# Altium PCB quadrotor4.PcbDoc
Units mil, origin at the board's own origin, x right, y up, seen from the top; angles counter-clockwise.
Board outline 2224.41 x 2352.36 mil, 2 copper layers (Top Layer, Bottom Layer); 100 components, 72 nets, 372 pads, 27 vias.
Unrouted connection lines stored in the file: 246.
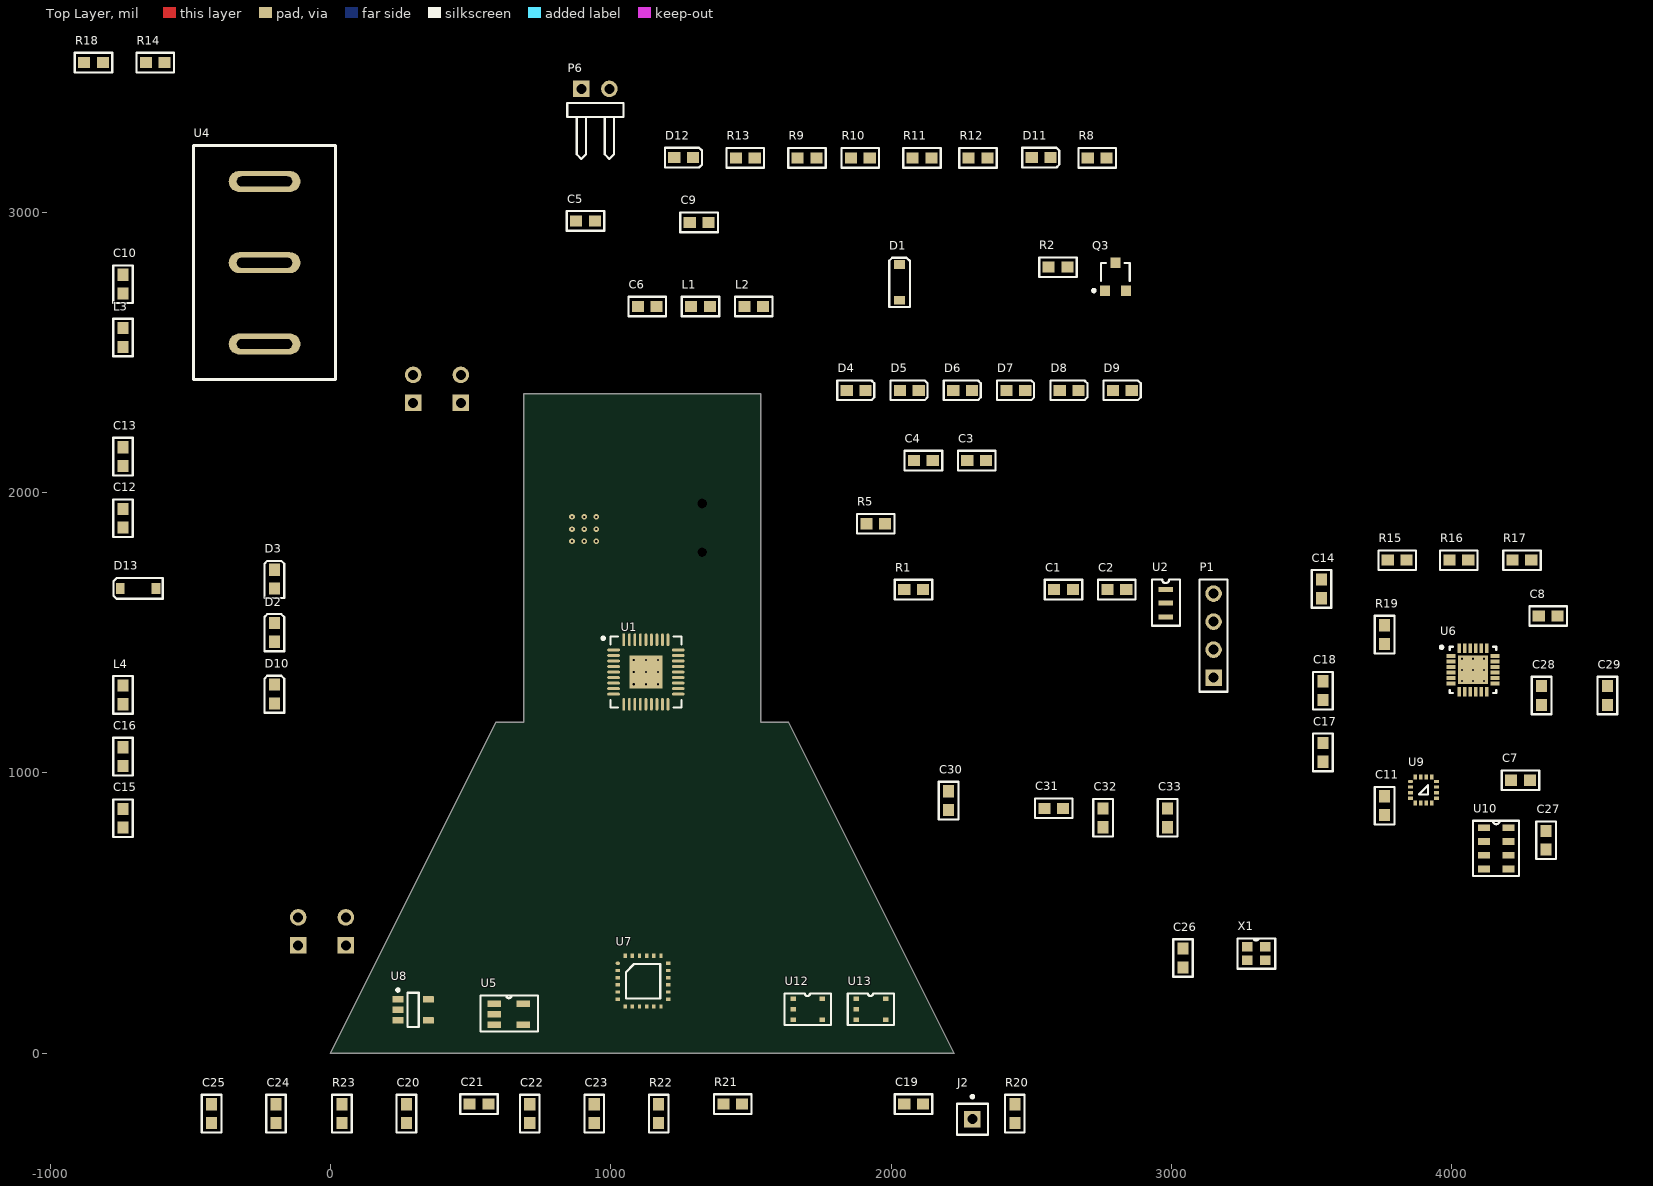
[diagram p0: Top Layer view]
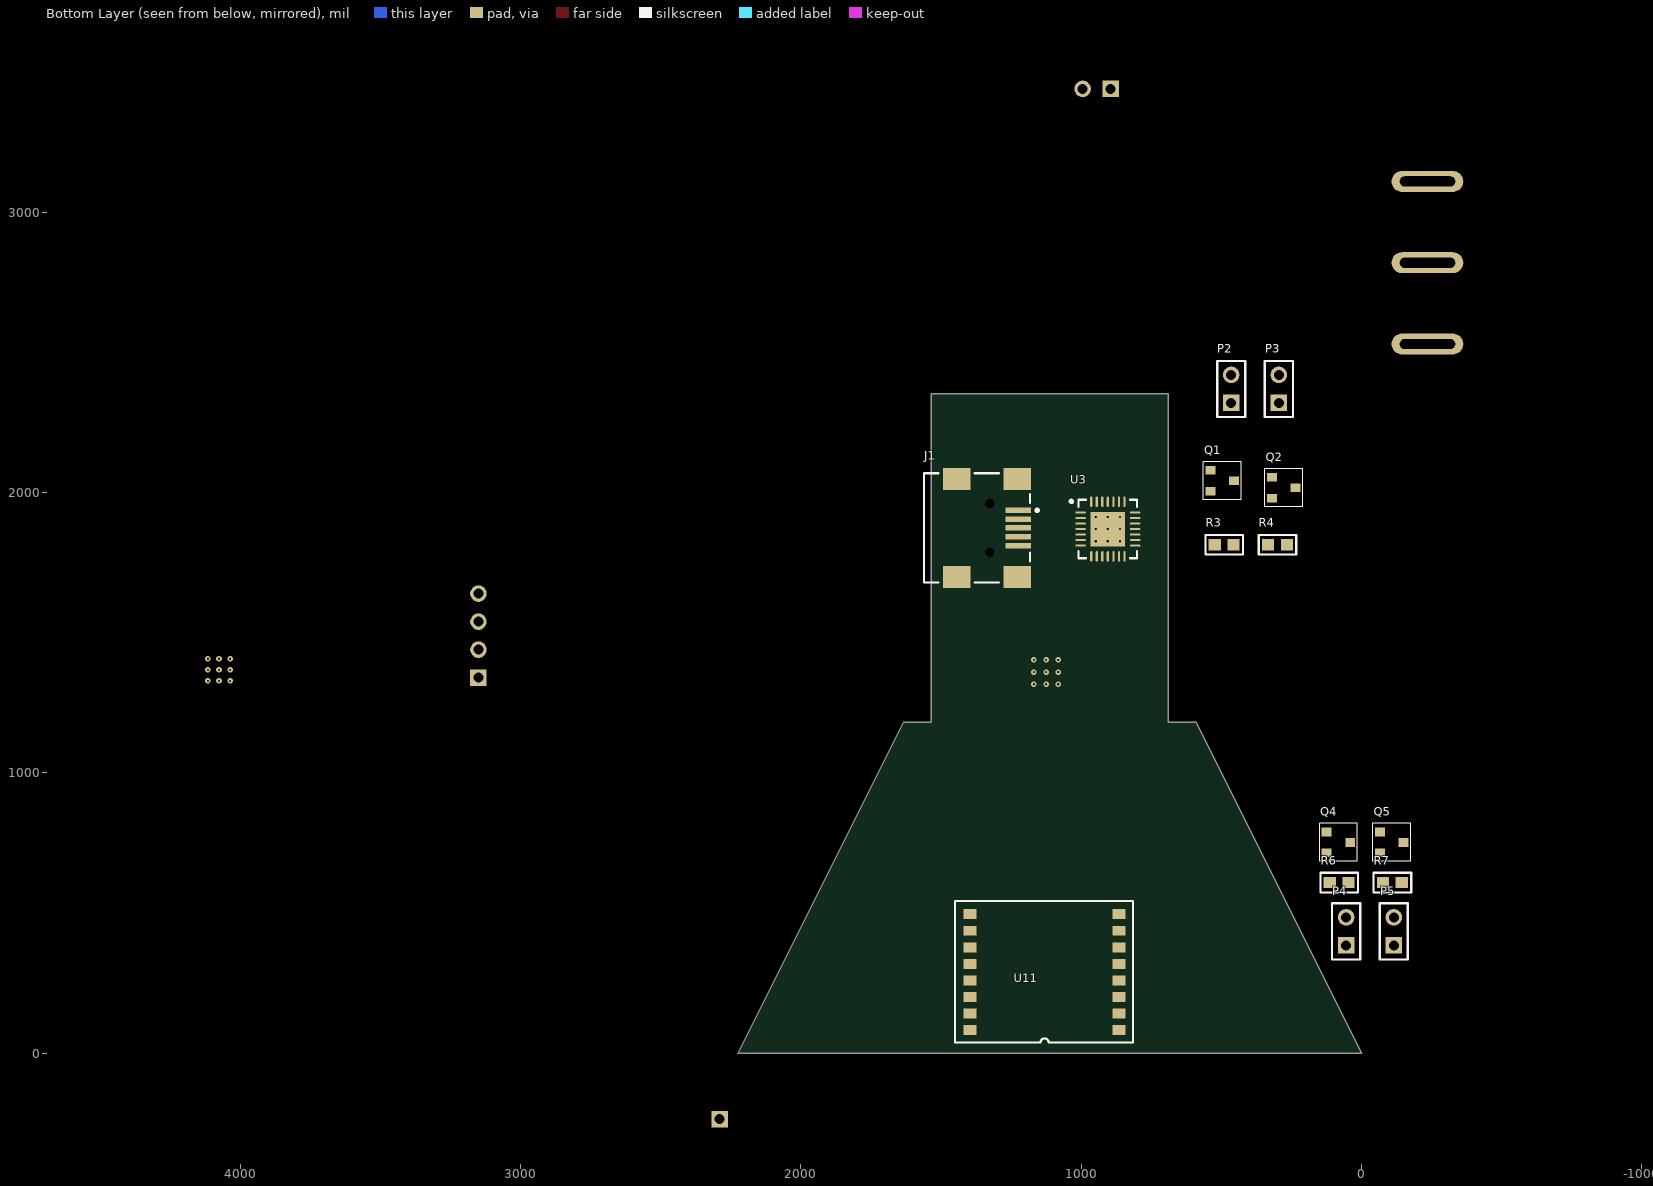
[diagram p1: Bottom Layer view, seen from below]

## Layer stack, top to bottom
Top Solder: solder mask 0.4, Solder Resist, Dk 3.5
Top Layer: signal copper 1.4
Dielectric 1: dielectric 12.6, FR-4, Dk 4.8
Bottom Layer: signal copper 1.4
Bottom Solder: solder mask 0.4, Solder Resist, Dk 3.5

## Board outline
0,0 590.55,1181.1 688.98,1181.1 688.98,2352.36 1535.43,2352.36 1535.43,1181.1 1633.86,1181.1 2224.41,0

## Design rules (kind name [scope] priority, off if disabled: settings)
Clearance [All] p1: gap=10 ignorepadtopadclearanceinfootprint=FALSE except(0: Arc-Hole Track-Hole SMDPad-Hole THPad-Hole Via-Hole Fill-Hole Poly-Hole Region-Hole Text-Hole)
PolygonConnect [All] p1: connectstyle=Relief reliefconductorwidth=10 reliefentries=4 polygonreliefangle="90 Angle" airgapwidth=10
RoutingVias [All] p1: holewidth=28 width=50 viastyle="Through Hole" minholewidth=28 minwidth=50 maxholewidth=28 maxwidth=50
SolderMaskExpansion [All] p1: expansion=4
Width [All] p1: maxlimit=10 minlimit=10 preferedwidth=10
30 further rules are at their usual default settings.

## Components (designator, comment, footprint, x,y, rotation, side; value= is the part's Value field where it differs from the comment)
C1 "CAP" 0603 2615,1655 r0 top value=0.1uF
C2 "CAP" 0603 2805,1655 r0 top value=2.2uF
C3 "CAP" 0603 2305,2115 r0 top value=2.2uF
C4 "CAP" 0603 2115,2115 r0 top value=2.2uF
C5 "CAP" 0603 910,2970 r0 top value=2.2uF
C6 "CAP" 0603 1130,2665 r0 top value=10uF
C7 "CAP" 0603 4245,975 r0 top value=2.2nF
C8 "CAP" 0603 4343.46,1561 r0 top value=0.1uF
C9 "CAP" 0603 1315,2965 r0 top value=1.5pF
C10 "CAP" 0603 -741,2743.46 r90 top value=1pF
C11 "CAP" 0603 3759,883.46 r90 top value=2.2uF
C12 "CAP" 0603 -741,1908.46 r90 top value=0.1uF
C13 "CAP" 0603 -741,2128.46 r90 top value=2.2uF
C14 "CAP" 0603 3534,1656.54 r90 top value=4.7uF
C15 "CAP" 0603 -741,838.46 r90 top value=2.2nF
C16 "CAP" 0603 -741,1058.46 r90 top value=4.7pF
C17 "CAP" 0603 3539,1073.46 r90 top value=2.2uF
C18 "CAP" 0603 3539,1293.46 r90 top value=2.2uF
C19 "CAP" 0603 2080,-180 r0 top value=220pF
C20 "CAP" 0603 270,-215 r90 top value=0.1uF
C21 "CAP" 0603 530,-180 r0 top value=10uF
C22 "CAP" 0603 710,-215 r90 top value=0.1uF
C23 "CAP" 0603 940,-215 r90 top value=2.2uF
C24 "CAP" 0603 -195,-215 r90 top value=2.2uF
C25 "CAP" 0603 -425,-215 r90 top value=22pF
C26 "CAP" 0603 3040,340 r90 top value=22pF
C27 "CAP" 0603 4335,760 r90 top value=220nF
C28 "CAP" 0603 4319,1276.54 r90 top value=2.2uF
C29 "CAP" 0603 4554,1276.54 r90 top value=0.1uF
C30 "CAP" 0603 2204,901.54 r90 top value=2.2uF
C31 "CAP" 0603 2580,875 r0 top value=0.1uF
C32 "CAP" 0603 2755,840 r90 top value=2.2uF
C33 "CAP" 0603 2985,840 r90 top value=0.1uF
D1 "DIODE" Diode 2030,2750 r90 top
D2 "LED" DIODE0603 -200,1501.54 r90 top
D3 "LED" DIODE0603 -200,1691.54 r90 top
D4 "LED" DIODE0603 1875,2365 r0 top
D5 "LED" DIODE0603 2065,2365 r0 top
D6 "LED" DIODE0603 2255,2365 r0 top
D7 "LED" DIODE0603 2445,2365 r0 top
D8 "LED" DIODE0603 2635,2365 r0 top
D9 "LED" DIODE0603 2825,2365 r0 top
D10 "LED" DIODE0603 -200,1281.54 r90 top
D11 "LED" DIODE0603 2535,3195 r0 top
D12 "LED" DIODE0603 1260,3195 r0 top
D13 "DIODE" Diode -686,1658.46 r180 top
J1 "USB" USB 1385,1875 r0 bottom
J2 "Socket" PIN1 2290,-235 r0 top
L1 "INDUCTOR" 0603 1320,2665 r0 top value=8.2nH
L2 "INDUCTOR" 0603 1510,2665 r0 top value=3.9nH
L3 "INDUCTOR" 0603 -741,2553.46 r90 top value=2.7nH
L4 "INDUCTOR" 0603 -741,1278.46 r90 top value=4.7uH
P1 "Header 4" HDR1X4 3150,1340 r90 top
P2 "Header 2" HDR1X2 465,2320 r90 bottom
P3 "Header 2" HDR1X2 295,2320 r90 bottom
P4 "Header 2" HDR1X2 55,385 r90 bottom
P5 "Header 2" HDR1X2 -115,385 r90 bottom
P6 "Header 2H" HDR1X2H 895,3440 r0 top
Q1 "SI2302" SI2303 539.29,2079.8 r180 bottom
Q2 "SI2302" SI2303 320,2055 r180 bottom
Q3 "QNPN" SOT-23B 2800,2770 r0 top
Q4 "SI2302" SI2303 125,790 r180 bottom
Q5 "SI2302" SI2303 -65,790 r180 bottom
R1 "RES" 0603 2080,1655 r0 top value=10K
R2 "RES" 0603 2595,2805 r0 top value=1K
R3 "RES" 0603 490,1815 r180 bottom value=33K
R4 "RES" 0603 300,1815 r180 bottom value=33K
R5 "RES" 0603 1945,1890 r0 top value=100
R6 "RES" 0603 80,610 r180 bottom value=33K
R7 "RES" 0603 -110,610 r180 bottom value=33K
R8 "RES" 0603 2735,3195 r0 top value=100
R9 "RES" 0603 1700,3195 r0 top value=100
R10 "RES" 0603 1890,3195 r0 top value=100
R11 "RES" 0603 2110,3195 r0 top value=100
R12 "RES" 0603 2310,3195 r0 top value=100
R13 "RES" 0603 1480,3195 r0 top value=100
R14 "RES" 0603 -625,3535 r0 top value=22K
R15 "RES" 0603 3805,1760 r0 top value=3K
R16 "RES" 0603 4025,1760 r0 top value=3K
R17 "RES" 0603 4250,1760 r0 top value=3K
R18 "RES" 0603 -845,3535 r0 top value=1.65K
R19 "RES" 0603 3759,1493.46 r90 top value=3K
R20 "RES" 0603 2440,-215 r90 top value=33K
R21 "RES" 0603 1435,-180 r0 top value=33K
R22 "RES" 0603 1170,-215 r90 top value=33K
R23 "RES" 0603 40,-215 r90 top value=10K
U1 "STM32F103T8U6TR" STM-VFQFPN36_M 1125.16,1360 r0 top
U2 "CSTCE8M00" CSTCE8M00 2980,1655 r0 top
U3 "CP2102-GM" SLAB-QFN-28-3125x3125TP_M 905,1870 r180 bottom
U4 "SW" SW -235,2820 r0 top
U5 "LTC4054" LTC4054 585,177.4 r0 top
U6 "MPU6050" INSE-QFN-24_V 4075.47,1367.76 r0 top
U7 "NRF24L01" NRF24L01 1025,321.18 r0 top
U8 "LM27313XQMF/NOPB" DBV0005A_N 295,155 r0 top
U9 "HMC5883" HMC5883 3852.48,969.37 r0 top
U10 "MS5611" MS5611 4115,805 r0 top
U11 "HM-06-BT" HM-06 865,82.83 r0 bottom
U12 "MIC5205" MIC5205 1650,195 r0 top
U13 "MIC5205" MIC5205 1875,195 r0 top
X1 "+/-20PPM" CST20PPM 3270,380 r0 top

## Footprints (in the part's own frame and the unit in brackets; to place one, negate y for a bottom-side part, rotate by r counter-clockwise, add the part's x,y. Pads: shape width x height; smd on the part's side, far side on the other; paste and mask are expansions set on the pad)
0603 [mm]
  rect 1.1x1 smd: 1(-0.85,-0.025) 2(0.85,-0.025)
  silkscreen extent -1.7,-0.91 1.7,0.86
CST20PPM [mm]
  rect 0.95x0.85 smd: 1(0,-1.22) 2(1.62,-1.22) 3(1.62,0) 4(0,0)
  silkscreen extent -0.89,-1.98 2.54,0.76
CSTCE8M00 [mm]
  rect 1.3x0.45 smd: 1(0,0) 2(0,-1.25) 3(0,-2.5)
  silkscreen extent -1.27,-3.3 1.27,0.88
DBV0005A_N [mm] "SOT23, 5-Leads, Body 3.05x1.75mm, Pitch 0.95mm, IPC Medium Density"
  rrect17% 1x0.6 smd: 1(-1.375,0.95) 2(-1.375,0) 3(-1.375,-0.95) 4(1.375,-0.95) 5(1.375,0.95)
  silkscreen extent -1.5,-1.55 0.5,1.92, body extent -1.42,-1.46 1.42,1.46, height 1.08
Diode [mm]
  rect 0.8x1 smd: A(-1.62,0) K(1.62,0)
  silkscreen extent -2.24,-0.94 2.24,0.94
DIODE0603 [mm]
  rect 1.1x1 smd: 1(-0.85,0) 2(0.85,0)
  silkscreen extent -1.7,-0.89 1.65,0.89
HDR1X2 [mm] "Connector; Header; 2 Position"
  rect 1.5x1.5 hole 0.9: 1(0,0)
  round 1.5 hole 0.9: 2(2.54,0)
  silkscreen extent -1.27,-1.27 3.81,1.27
HDR1X2H [mm] "Connector; Header; 2 Position; Right Angle"
  rect 1.5x1.5 hole 0.9: 1(0,0)
  round 1.5 hole 0.9: 2(2.54,0)
  silkscreen extent -1.27,-6.35 3.81,-1.27
HDR1X4 [mm] "Connector; Header; 4 Position"
  rect 1.5x1.5 hole 0.9: 1(0,0)
  round 1.5 hole 0.9: 2(2.54,0) 3(5.08,0) 4(7.62,0)
  silkscreen extent -1.27,-1.27 8.89,1.27
HM-06 [mm]
  rect 1.2x0.9 smd: 1(0,0) 2(0,-1.5) 3(0,-3) 4(0,-4.5) 5(0,-6) 6(0,-7.5) 7(0,-9) 8(0,-10.5) 9(13.5,-10.5) 10(13.5,-9) 11(13.5,-7.5) 12(13.5,-6) 13(13.5,-4.5) 14(13.5,-3) 15(13.5,-1.5) 16(13.5,0)
  silkscreen extent -1.27,-11.68 14.86,1.13
HMC5883 [mm]
  oval 0.45x0.3 smd: 1(0,0)
  rect 0.45x0.3 smd: 2(0,-0.5) 3(0,-1) 4(0,-1.5) 9(2.35,-1.5) 10(2.35,-1) 11(2.35,-0.5) 12(2.35,0)
  rect 0.3x0.45 smd: 5(0.425,-1.925) 6(0.925,-1.925) 7(1.425,-1.925) 8(1.925,-1.925) 13(1.925,0.425) 14(1.425,0.425) 15(0.925,0.425) 16(0.425,0.425)
  silkscreen extent 0.76,-1.16 1.59,-0.33
INSE-QFN-24_V [mm] "QFN, 24-Leads, Body 4.00x4.00mm, Pitch 0.50mm, Thermal Pad 2.7x2.6mm"
  rect 0.8x0.35 smd: 1(-2,1.25) 2(-2,0.75) 3(-2,0.25) 4(-2,-0.25) 5(-2,-0.75) 6(-2,-1.25) 13(2,-1.25) 14(2,-0.75) 15(2,-0.25) 16(2,0.25) 17(2,0.75) 18(2,1.25)
  rect 0.35x0.85 smd: 7(-1.25,-1.975) 8(-0.75,-1.975) 9(-0.25,-1.975) 10(0.25,-1.975) 11(0.75,-1.975) 12(1.25,-1.975) 19(1.25,1.975) 20(0.75,1.975) 21(0.25,1.975) 22(-0.25,1.975) 23(-0.75,1.975) 24(-1.25,1.975)
  rect 2.7x2.6 smd: 25(0,0)
  silkscreen extent -2.97,-2.1 2.1,2.17, body extent -2,-2 2,2, height 0.95
LTC4054 [mm]
  rect 1.22x0.6 smd: 1(0,0) 2(0,-0.95) 3(0,-1.9) 4(2.62,-1.9) 5(2.62,0)
  silkscreen extent -1.27,-2.54 3.94,0.73
MIC5205 [mm]
  rect 0.5x0.4 smd: 1(0,0) 2(0,-0.95) 3(0,-1.9) 4(2.667,-1.9) 5(2.667,0)
  silkscreen extent -0.76,-2.38 3.43,0.48
MS5611 [mm]
  rect 1.1x0.6 smd: 1(0,0) 2(0,-1.25) 3(0,-2.5) 4(0,-3.75) 5(2.2,-3.75) 6(2.2,-2.5) 7(2.2,-1.25) 8(2.2,0)
  silkscreen extent -1.02,-4.38 3.17,0.63
NRF24L01 [mm]
  oval 0.4x0.3 smd: 1(0,0)
  rect 0.4x0.3 smd: 2(0,-0.65) 3(0,-1.3) 4(0,-1.95) 5(0,-2.6) 6(0,-3.25) 13(4.58,-3.25) 14(4.58,-2.6) 15(4.58,-1.95) 16(4.58,-1.3) 17(4.58,-0.65) 18(4.58,0)
  rect 0.3x0.4 smd: 7(0.665,-3.915) 8(1.315,-3.915) 9(1.965,-3.915) 10(2.615,-3.915) 11(3.265,-3.915) 12(3.915,-3.915) 19(3.915,0.665) 20(3.265,0.665) 21(2.615,0.665) 22(1.965,0.665) 23(1.315,0.665) 24(0.665,0.665)
  silkscreen extent 0.73,-3.18 3.85,-0.07
PIN1 [mm] "Connector; Plug"
  rect 1.5x1.5 hole 0.9: 1(0,0)
  silkscreen extent -1.4,-1.4 1.4,2.17
SI2303 [mm]
  rect 0.9x0.8 smd: 1(0,0) 2(0,-1.9) 3(2.15,-0.95)
  silkscreen extent -0.64,-2.67 2.79,0.76, body extent 0.37,-2.45 1.78,0.55, height 1.1
SLAB-QFN-28-3125x3125TP_M [mm] "QFN, 28-Leads, Body 5x5mm, Pitch 0.5mm, Thermal Pad 3.13x3.13mm, IPC Low Density"
  oval 0.95x0.2 smd: 1(-2.475,1.5) 2(-2.475,1) 3(-2.475,0.5) 4(-2.475,0) 5(-2.475,-0.5) 6(-2.475,-1) 7(-2.475,-1.5) 15(2.475,-1.5) 16(2.475,-1) 17(2.475,-0.5) 18(2.475,0) 19(2.475,0.5) 20(2.475,1) 21(2.475,1.5)
  oval 0.2x0.95 smd: 8(-1.5,-2.475) 9(-1,-2.475) 10(-0.5,-2.475) 11(0,-2.475) 12(0.5,-2.475) 13(1,-2.475) 14(1.5,-2.475) 22(1.5,2.475) 23(1,2.475) 24(0.5,2.475) 25(0,2.475) 26(-0.5,2.475) 27(-1,2.475) 28(-1.5,2.475)
  rect 3.13x3.13 smd: 29(0,0)
  silkscreen extent -3.42,-2.65 2.65,2.65, body extent -2.5,-2.5 2.5,2.5, height 1
SOT-23B [mm] "SOT-23; 3 Leads; Body 3.0 x 2.6 mm, inc. leads (LxW max)"
  rect 0.9x0.95 smd: 1(-0.95,-1.25) 2(0.95,-1.25) 3(0,1.25)
  silkscreen extent -2.07,-1.37 1.3,1.25
STM-VFQFPN36_M [mm] "QFN, 36-Leads, Body 6.13x6.13mm, Pitch 0.5mm, Thermal Pad 3x3mm, IPC Low Density"
  oval 1.15x0.25 smd: 1(-2.925,2) 2(-2.925,1.5) 3(-2.925,1) 4(-2.925,0.5) 5(-2.925,0) 6(-2.925,-0.5) 7(-2.925,-1) 8(-2.925,-1.5) 9(-2.925,-2) 19(2.925,-2) 20(2.925,-1.5) 21(2.925,-1) 22(2.925,-0.5) 23(2.925,0) 24(2.925,0.5) 25(2.925,1) 26(2.925,1.5) 27(2.925,2)
  oval 0.25x1.15 smd: 10(-2,-2.925) 11(-1.5,-2.925) 12(-1,-2.925) 13(-0.5,-2.925) 14(0,-2.925) 15(0.5,-2.925) 16(1,-2.925) 17(1.5,-2.925) 18(2,-2.925) 28(2,2.925) 29(1.5,2.925) 30(1,2.925) 31(0.5,2.925) 32(0,2.925) 33(-0.5,2.925) 34(-1,2.925) 35(-1.5,2.925) 36(-2,2.925)
  rect 3x3 smd: 37(0,0)
  silkscreen extent -3.99,-3.21 3.21,3.21, body extent -3.07,-3.07 3.07,3.07, height 1
SW [mm]
  oval 6.5x1.9 hole 0.9 slot 5 at 0 deg: 1(0,7.366) 2(0,0) 3(0,-7.366)
  silkscreen extent -6.43,-10.59 6.43,10.62
USB [mm]
  rect 2.3x0.5 smd: 1(-4.091,-1.575) 2(-4.091,-0.775) 3(-4.091,0.025) 4(-4.091,0.825) 5(-4.091,1.625)
  rect 2.5x2 smd: 6(-3.991,4.475) 7(1.509,4.475) 8(-3.991,-4.425) 9(1.509,-4.425)
  round 0.6 hole 0.9 unplated: MH1(-1.491,2.225) MH2(-1.491,-2.175)
  silkscreen extent -5.92,-4.92 4.46,4.98

## Part data
P1: "Header, 4-Pin", LatestRevisionDate=17-Jul-2002, LatestRevisionNote="Re-released for DXP Platform.", Publisher="Altium Limited"
P2 P3 P4 P5: "Header, 2-Pin", LatestRevisionDate=17-Jul-2002, LatestRevisionNote="Re-released for DXP Platform.", Publisher="Altium Limited"
P6: "Header, 2-Pin, Right Angle", LatestRevisionDate=17-Jul-2002, LatestRevisionNote="Re-released for DXP Platform.", Publisher="Altium Limited"
Q3: "NPN Bipolar Transistor", Code_JEDEC=SOT-23, LatestRevisionDate=17-Jul-2002, LatestRevisionNote="Re-released for DXP Platform.", PackageReference=SOT-23B, Published=8-Jun-2000, Publisher="Altium Limited"
U1: library part CMP-0237-00058-3, "ARM Cortex-M3 32-bit MCU, 64 KB Flash, 20 KB Internal RAM, 26 I/Os, 36-pin VFQFPN, -40 to 85 degC, Tape and Reel", I/Os (High Current)=26, Operating Frequency(F) (Processor speed) (MHz)=72, Supply Voltage(Vcc) min (V)=2, A/D Converter="2x12-bit (10 Channel)", ComponentLink1Description="Manufacturer URL", ComponentLink1URL=http://www.st.com/web/en/home.html, ComponentLink2Description=Datasheet, ComponentLink2URL=http://www.st.com/st-web-ui/static/active/en/resource/technical/document/datasheet/CD00161566.pdf, ComponentLink3Description="Package Specification", ComponentLink3URL=http://www.st.com/st-web-ui/static/active/en/resource/technical/document/datasheet/CD00161561.pdf, Core="ARM Cortex-M3", DatasheetVersion="Rev. 16", FLASH Size (Prog) (kB)=64, Internal RAM Size (kB)=20, Mounting Technology="Surface Mount", PackageDescription="36-Pin Quad Flat No-Lead, 6 x 6 x 1.0 mm Body, 0.5 mm Pitch, Exposed Pad", PackageReference=VFQFPN36, PackageVersion="Rev. 16, 08/2013", Packing="Tape and Reel", PartId=1, PartNumber=STM32F103T8U6TR
U3: library part CMP-0511-00012-1, "Single-Chip USB to UART Bridge, 1024 Bytes EEPROM, -40 to 85 degC, 28-pin QFN, Tube", Manufacturer="Silicon Labs", Code_IPC=J-STD-020C, Code_JEDEC=MO-220, ComponentLink1Description="Manufacturer URL", ComponentLink1URL=http://www.silabs.com/, ComponentLink2Description=Datasheet, ComponentLink2URL=http://www.silabs.com/Support%20Documents/TechnicalDocs/CP2102-9.pdf, ComponentLink3Description="Package Specification", ComponentLink3URL=http://www.silabs.com/Support%20Documents/TechnicalDocs/C8051T61x.pdf, DatasheetVersion="Rev. 1.5", EEPROM="1024 Bytes", Internal Oscillator=TRUE, Mounting Technology="Surface Mount", PackageDescription="28-Pin Quad-Flat No-Leads Package, Body 5 x 5 mm, Pitch 0.5 mm", PackageReference=QFN-28, PartId=1, PartNumber=CP2102-GM, Sub-Family="USB Bridges"
U6: library part CMP-1753-00002-1, "3-Axis Gyroscope, 3-Axis Accelerometer / , 2.375 to 3.46 V, -40 to 105 degC, 24-Pin QFN, RoHS, Tape and Reel", Case/Package=0603, Case Code (Metric)=1608, Max Operating Temperature=155degC, Min Operating Temperature=-55degC, Package Quantity=5000, Power Rating="100 mW", Resistance="5.6 kohm", Tolerance=1%, Voltage Rating="75 V", Case Code (Imperial)=0603, ComponentLink1Description="Manufacturer URL", ComponentLink1URL=http://www.invensense.com/, ComponentLink2Description=Datasheet, ComponentLink2URL=https://datasheet.ciiva.com/1513/1788002-1513632.pdf, DatasheetVersion="Rev. 3.4, 08/2013", Height="0.45 mm", Length="1.6 mm", Mount="Surface Mount", PackageDescription="24-Pin Quad Flat No-lead Package, Body 4 x 4 mm, Pitch 0.5 mm", PackageReference=QFN-24, Packaging="Tape and Reel", PartId=1, Pins=2, Radiation Hardening=No, REACH SVHC=Yes, RoHSCompliant=True, Width="0.8 mm"
U8: library part CMP-0069-02205-2, "1.6 MHz Boost Converter With 30V Internal FET Switch, Automotive Grade 1, 5-pin SOT-23, Pb-Free, 1000 Reel", Manufacturer="Texas Instruments", PackageTopMarking=SD3B*XTT, PowerWise=N, ComponentLink1Description="Datasheet URL", ComponentLink1URL=http://www.ti.com/general/docs/lit/getliterature.tsp?genericPartNumber=LM27313-Q1&fileType=pdf, CompType=Switcher, High-Reliability=Y, PackageDescription="Molded SOT-23, .115 x .063 x .040 in Body, 5 Lead, .0375 in Pitch", PackageReference=DBV0005A, PartNumber=LM27313XQMF/NOPB, PinCount=5, RoHS=Y
J2: LatestRevisionDate=17-Jul-2002, LatestRevisionNote="Re-released for DXP Platform.", Publisher="Altium Limited"

## Via types
v1: diameter 19.68, hole 7.87, Top Layer to Bottom Layer, 27 vias

## Nets (pads, with @x,y where several pads share a name; then routed paths per layer and width w, separated by ;. In a path a pad name is that pad's centre, name@x,y a point inside that pad or via, vN(x,y) a via of type N, cw(c..) or ccw(c..) an arc to the next point about the centre after c; other vN are vias at no path point)
ANT1: L1.1 L3.2 U7.12
ANT2: L1.2 L2.2 U7.13
BAT_DET: C24.1 R21.2 R22.2 U1.15
BOOT0: Q3.1 R1.1 U1.35
BT_EN: U1.17 U13.3
BT_LED: R8.2 U11.15
CE: U1.24 U7.1
CHG_LED: D10.2 U5.1
CSN: U1.11 U7.2
DN: J1.2 U3.5
DP: J1.3 U3.4
GND: C1.2 C2.2 C3.2 C4.2 C5.2 C6.2 C7.2 C8.2 C10.2 C11.2 C12.2 C13.2 C14.2 C15.2 C16.2 C17.2 C18.2 C20.2 C21.2 C22.2 C23.2 C24.2 C25.2 C26.2 C28.2 C29.2 C30.2 C31.2 C32.2 C33.2 D2.2 D3.2 D4.2 D5.2 D6.2 D7.2 D8.2 D9.2 D11.2 D12.2 J1.5 J1.6 J1.7 J1.8 J1.9 P1.4 P6.1 Q1.2 Q2.2 Q3.3 Q4.2 Q5.2 R3.1 R4.1 R6.1 R7.1 R14.1 R18.1 R22.1 R23.2 U1.5 U1.18 U1.26 U1.36 U1.37 U2.2 U3.3 U3.29 U5.2 U6.1 U6.9 U6.11 U6.15 U6.17 U6.18 U7.8 U7.14 U7.17 U7.20 U8.2 U9.9 U9.11 U10.3 U10.4 U10.5 U11.12 U12.2 U13.2 X1.2 X1.4
  other v1: 1081.85,1316.69 1125.16,1316.69 1168.46,1316.69 1081.85,1360 1125.16,1360 1168.46,1360 1081.85,1403.31 1125.16,1403.31 1168.46,1403.31 861.69,1826.69 905,1826.69 948.31,1826.69 861.69,1870 905,1870 948.31,1870 861.69,1913.31 905,1913.31 948.31,1913.31
HM_INT: R19.2 U1.31 U9.15
I2C_SCL: R16.2 U1.33 U6.23
I2C_SDA: R15.2 U1.34 U6.24
MISO: U1.13 U7.5
MOSI: U1.14 U7.4
MP_INT: R17.2 U1.32 U6.12
NetC5_1: C5.1 U7.19
NetC6_1: C6.1 U5.4
NetC7_1: C7.1 U6.20
NetC8_1: C8.1 U6.10
NetC9_1: C9.1 L2.1
NetC9_2: C9.2 C10.1 J2.1
NetC14_1: C14.1 U9.10
NetC15_1: C15.1 C16.1 L3.1 U7.11
NetC19_2: C19.2 R20.2 R23.1 U8.3
NetC25_1: C25.1 U7.10 X1.1
NetC26_1: C26.1 U7.9 X1.3
NetC27_1: C27.1 U9.8
NetD2_1: D2.1 D3.1 R9.2
NetD4_1: D4.1 D5.1 R10.2
NetD6_1: D6.1 D7.1 R11.2
NetD8_1: D8.1 D9.1 R12.2
NetD10_1: D10.1 R5.1
NetD11_1: D11.1 R8.1
NetD12_1: D12.1 R13.1
NetD13_A: D13.A L4.1 U8.1
NetP2_2: P2.2 Q1.3
NetP3_2: P3.2 Q2.3
NetP4_2: P4.2 Q4.3
NetP5_2: P5.2 Q5.3
NetP6_2: P6.2 U4.2
NetQ3_2: Q3.2 U3.28
NetR14_2: R14.2 U7.16
NetU4_3: U4.3 U5.3
NRF_IRQ: U1.29 U7.6
OSC_IN: U1.2 U2.1
OSC_OUT: U1.3 U2.3
PA8: R10.1 U1.20
PA11: R9.1 U1.23
PB1: R11.1 U1.16
PB3: R12.1 U1.30
PWMA: Q1.1 R3.2 U1.7
PWMB: Q2.1 R4.2 U1.8
PWMC: Q4.1 R6.2 U1.9
PWMD: Q5.1 R7.2 U1.10
Q_SCK: U6.7 U9.1 U10.8
Q_SDA: U6.6 U9.16 U10.7
RST: C3.1 R2.1 U1.4 U3.24
RXD_BT: U1.22 U3.26 U11.2
SCK: U1.12 U7.3
SETC: C27.2 U9.12
SWCLK: P1.1 U1.28
SWDIO: P1.2 U1.25
TXD_BT: U1.21 U3.25 U11.4
V3D3: C1.1 C2.1 C11.1 C17.1 C18.1 C22.1 C23.1 C28.1 C29.1 C30.1 C31.1 P1.3 R2.2 R13.2 R15.1 R16.1 R17.1 R19.1 U1.1 U1.6 U1.19 U1.27 U6.3 U6.8 U6.13 U7.7 U7.15 U7.18 U9.2 U9.13 U10.1 U10.2 U12.5
V5D0: C12.1 C13.1 C19.1 D1.K D13.K R20.1 U12.1 U12.3 U13.1
V33BT: C32.1 C33.1 U11.9 U13.5
VBUS: D1.A J1.1 R1.2 R5.2 R18.2 U3.7 U3.8 U5.5
VDDCP2102: C4.1 U3.6
VSYS: C20.1 C21.1 L4.2 P2.1 P3.1 P4.1 P5.1 R21.1 U4.1 U8.4 U8.5
pads on no net: J1.4 J1.MH1 J1.MH2 U3.1 U3.2 U3.9 U3.10 U3.11 U3.12 U3.13 U3.14 U3.15 U3.16 U3.17 U3.18 U3.19 U3.20 U3.21 U3.22 U3.23 U3.27 U6.2 U6.4 U6.5 U6.14 U6.16 U6.19 U6.21 U6.22 U6.25 U7.21 U7.22 U7.23 U7.24 U9.3 U9.4 U9.5 U9.6 U9.7 U9.14 U10.6 U11.1 U11.3 U11.5 U11.6 U11.7 U11.8 U11.10 U11.11 U11.13 U11.14 U11.16 U12.4 U13.4
copper on no net:
  other v1: 4036.1,1328.39 4075.47,1328.39 4114.84,1328.39 4036.1,1367.76 4075.47,1367.76 4114.84,1367.76 4036.1,1407.13 4075.47,1407.13 4114.84,1407.13

## Text inside footprints (layer, text, board x,y; h text height)
J1: Mechanical 1 "PCB Edge" at 1550.02,2032.91 h30 r90